# EAGLE board ikkeiplexing_7SEG (EAGLE 5.10)
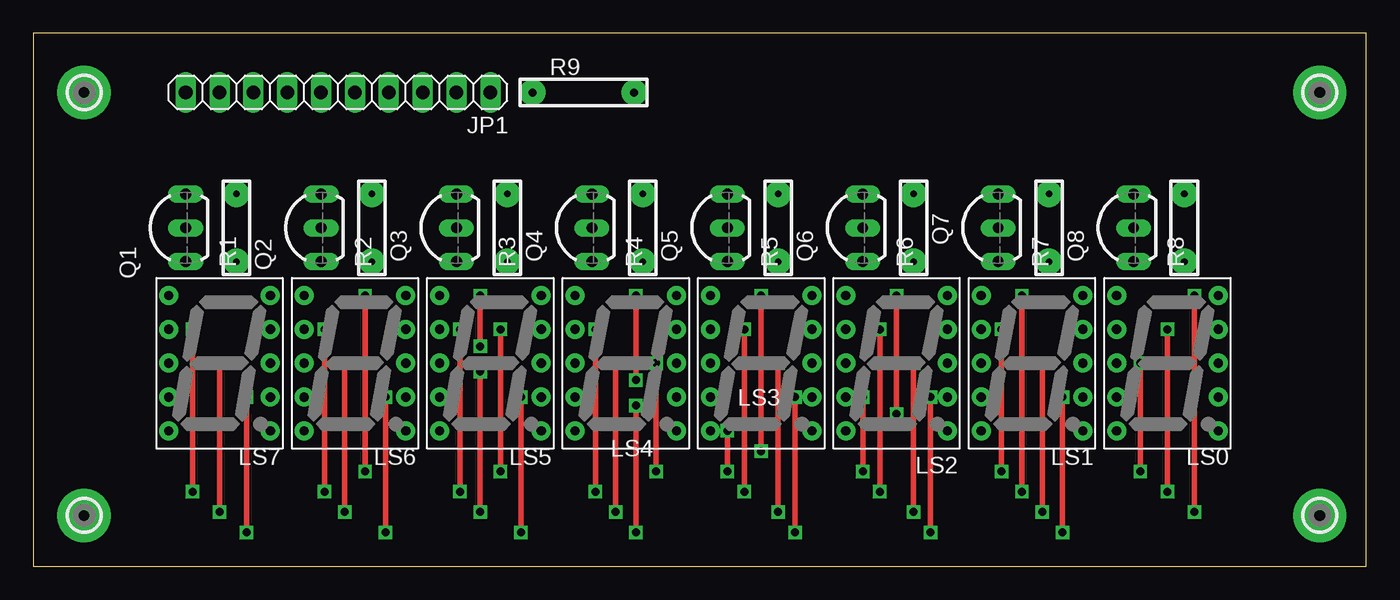
[diagram p0: board, top side]
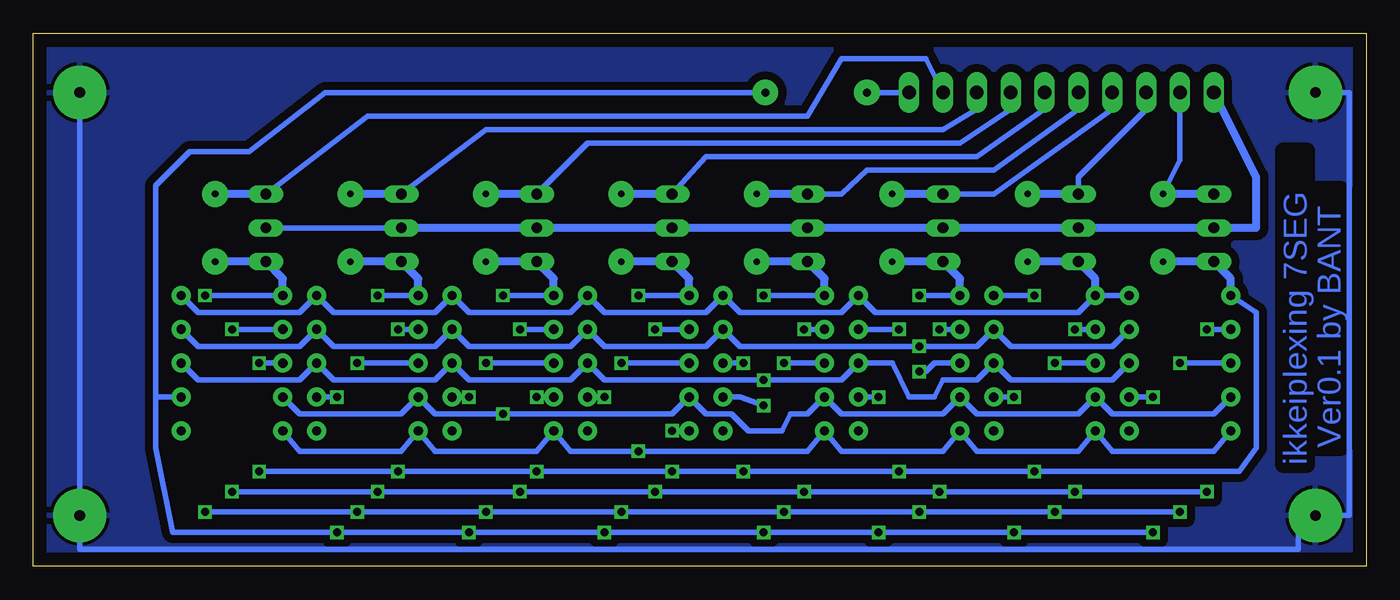
[diagram p1: board, bottom side, seen from below]

Size 100 x 40 mm. Coordinates in mm from the lower left corner, seen from the top.
Outline: 0,0 100,0 100,40 0,40 0,0
Copper layers (1*16): Top 0.035mm / dielectric 1.5mm / Bottom 0.035mm
Design rules "default": minimum track width 10mil, minimum drill 24mil, track to track 8mil, track to pad 8mil, pad to pad 8mil, via to via 8mil, smd to smd 8mil, copper to edge 40mil, drill to drill 8mil, minimum pad ring 10mil, minimum via ring 8mil, stop-mask expansion 4mil, vias tented up to drill 0mil, thermal gap 10mil

## Footprints (pad centres in the part's own frame; a part is rotated, then mirrored left to right if it is on the bottom)
1X10 = drill 1.016 long: 1 -11.43,0; 2 -8.89,0; 3 -6.35,0; 4 -3.81,0; 5 -1.27,0; 6 1.27,0; 7 3.81,0; 8 6.35,0; 9 8.89,0; 10 11.43,0
7SEG-10 = drill 0.7 pad 1.422 round: 1 -3.81,5.08; 2 -3.81,2.54; 3 -3.81,0; 4 -3.81,-2.54; 5 -3.81,-5.08; 6 3.81,-5.08; 7 3.81,-2.54; 8 3.81,0; 9 3.81,2.54; 10 3.81,5.08
PAD-2.1 = drill 0.8 pad 4 round: B2,1 0,0
TO92 = drill 0.813 long: B 2.54,0; C 0,0; E -2.54,0
R_0.125W_2 = drill 0.5 pad 1.93 round: 1 -2.54,0; 2 2.54,0
R_0.125W_3 = drill 0.6 pad 1.93 round: 1 -3.81,0; 2 3.81,0

## Placement (x,y rotation side)
JP1  [1X10]  22.86,35.56 180 top
LS0  [7SEG-10]  85.09,15.24 0 top
LS1  [7SEG-10]  74.93,15.24 0 top
LS2  [7SEG-10]  64.77,15.24 0 top
LS3  [7SEG-10]  54.61,15.24 0 top
LS4  [7SEG-10]  44.45,15.24 0 top
LS5  [7SEG-10]  34.29,15.24 0 top
LS6  [7SEG-10]  24.13,15.24 0 top
LS7  [7SEG-10]  13.97,15.24 0 top
MT1  MOUNT-PAD2.1  [PAD-2.1]  3.81,35.56 0 top
MT2  MOUNT-PAD2.1  [PAD-2.1]  3.81,3.81 0 top
MT3  MOUNT-PAD2.1  [PAD-2.1]  96.52,3.81 0 top
MT4  MOUNT-PAD2.1  [PAD-2.1]  96.52,35.56 0 top
Q1  2SC1815  [TO92]  11.43,25.4 90 top
Q2  2SC1815  [TO92]  21.59,25.4 90 top
Q3  2SC1815  [TO92]  31.75,25.4 90 top
Q4  2SC1815  [TO92]  41.91,25.4 90 top
Q5  2SC1815  [TO92]  52.07,25.4 90 top
Q6  2SC1815  [TO92]  62.23,25.4 90 top
Q7  2SC1815  [TO92]  72.39,25.4 90 top
Q8  2SC1815  [TO92]  82.55,25.4 90 top
R1  100  [R_0.125W_2]  15.24,25.4 270 top
R2  100  [R_0.125W_2]  25.4,25.4 270 top
R3  100  [R_0.125W_2]  35.56,25.4 270 top
R4  100  [R_0.125W_2]  45.72,25.4 270 top
R5  100  [R_0.125W_2]  55.88,25.4 270 top
R6  100  [R_0.125W_2]  66.04,25.4 270 top
R7  100  [R_0.125W_2]  76.2,25.4 270 top
R8  100  [R_0.125W_2]  86.36,25.4 270 top
R9  100  [R_0.125W_3]  41.27,35.56 0 top

## Library data of the parts
JP1 = pinheader
LS0 LS1-LS7 = 7seg_led
MT1-MT4 R1-R9 = MyLib
Q1-Q8 = bant

## Nets
GND: MT1.B2,1 MT2.B2,1 MT3.B2,1 MT4.B2,1
LINE2: JP1.9 Q1.B R1.1
LINE3: JP1.8 Q2.B R2.1
LINE4: JP1.7 Q3.B R3.1
LINE5: JP1.6 Q4.B R4.1
LINE6: JP1.5 Q5.B R5.1
LINE7: JP1.4 Q6.B R6.1
LINE8: JP1.3 Q7.B R7.1
LINE9: JP1.2 Q8.B R8.1
LINE10: JP1.1 R9.1
N$2: LS0.2 LS1.1 LS2.2 LS3.2 LS4.2 LS5.2 LS6.2 LS7.2 Q7.E R7.2
N$3: LS0.4 LS1.4 LS2.1 LS3.4 LS4.4 LS5.4 LS6.4 LS7.4 Q6.E R6.2
N$4: LS0.9 LS1.9 LS2.9 LS3.9 LS4.9 LS5.1 LS6.9 LS7.9 Q3.E R3.2
N$8: LS0.10 LS1.10 LS2.10 LS3.10 LS4.10 LS5.10 LS6.1 LS7.10 Q2.E R2.2
N$9: LS0.5 LS1.5 LS2.5 LS3.1 LS4.5 LS5.5 LS6.5 LS7.5 Q5.E R5.2
N$11: LS0.3 LS1.2 LS2.4 LS3.5 LS4.8 LS5.9 LS6.10 LS7.1 Q1.E R1.2
N$13: LS0.8 LS1.8 LS2.8 LS3.8 LS4.1 LS5.8 LS6.8 LS7.8 Q4.E R4.2
N$32: LS0.7 LS1.7 LS2.7 LS3.7 LS4.7 LS5.7 LS6.7 LS7.7 R9.2
N$34: LS0.1 LS1.3 LS2.3 LS3.3 LS4.3 LS5.3 LS6.3 LS7.3 Q8.E R8.2
VCC: JP1.10 Q1.C Q2.C Q3.C Q4.C Q5.C Q6.C Q7.C Q8.C

## Tracks (layer width: path | path; a pad name or v marks a point on that pad's centre or on a via)
GND
  Bottom 0.406: MT4.B2,1 MT3.B2,1 96.52,1.27 5.08,1.27 5.08,3.81 MT2.B2,1 1.27,3.81 1.27,35.56 MT1.B2,1
  pour Bottom (isolate 0.61): 0,40.64 0,0 100.33,0 100.33,40.64
LINE2
  Bottom 0.406: JP1.9 13.97,30.48 R1.1
  Bottom 0.61: Q1.B R1.1
LINE3
  Bottom 0.406: JP1.8 16.51,34.29 21.59,29.21 Q2.B
  Bottom 0.61: Q2.B R2.1
LINE4
  Bottom 0.406: Q3.B 27.94,27.94 19.05,34.29 JP1.7
  Bottom 0.61: Q3.B R3.1
LINE5
  Bottom 0.406: Q4.B 39.37,27.94 37.47,29.72 27.94,29.72 21.59,34.29 JP1.6
  Bottom 0.61: Q4.B R4.1
LINE6
  Bottom 0.406: Q5.B 49.53,30.73 29.21,30.73 24.13,34.29 JP1.5
  Bottom 0.61: Q5.B R5.1
LINE7
  Bottom 0.406: Q6.B 58.42,31.75 30.48,31.75 26.67,34.29 JP1.4
  Bottom 0.61: Q6.B R6.1
LINE8
  Bottom 0.406: Q7.B 66.04,32.77 31.75,32.77 29.21,34.29 JP1.3
  Bottom 0.61: Q7.B R7.1
LINE9
  Bottom 0.406: Q8.B 74.93,33.78 41.91,33.78 39.37,38.1 33.02,38.1 JP1.2
  Bottom 0.61: Q8.B R8.1
LINE10
  Bottom 0.406: JP1.1 R9.1
N$2  (via drill 0.6)
  Top 0.406: v85.09,5.59 v85.09,17.78 | v11.94,5.59 v11.94,17.78 | v21.84,5.59 v21.84,17.78 | v32,5.59 v32,17.78 | v42.16,5.59 v42.16,17.78 | v63.5,5.59 v63.5,17.78 | v74.17,5.59 v74.17,20.32 | v53.34,5.59 v53.34,17.78
  Bottom 0.406: v85.09,17.78 LS0.2 | v11.94,5.59 v21.84,5.59 v32,5.59 v42.16,5.59 v53.34,5.59 v63.5,5.59 v74.17,5.59 v85.09,5.59 | v11.94,17.78 LS7.2 | v21.84,17.78 LS6.2 | v32,17.78 LS5.2 | v42.16,17.78 LS4.2 | v63.5,17.78 LS2.2 | v74.17,20.32 LS1.1 | v53.34,17.78 LS3.2
  Bottom 0.61: LS1.1 71.12,21.59 Q7.E R7.2
N$3  (via drill 0.6)
  Top 0.406: v64.77,11.43 v64.77,20.32
  Bottom 0.406: LS7.4 11.43,11.43 19.05,11.43 LS6.4 21.59,11.43 29.21,11.43 LS5.4 31.75,11.43 39.37,11.43 LS4.4 41.91,11.43 43.18,11.43 43.81,10.16 46.35,10.16 47.62,11.43 49.53,11.43 LS3.4 52.07,11.43 v64.77,11.43 69.85,11.43 LS1.4 72.39,11.43 80.01,11.43 LS0.4 | v64.77,20.32 LS2.1
  Bottom 0.61: LS2.1 60.96,21.59 Q6.E R6.2
N$4  (via drill 0.6)
  Top 0.406: v33.53,16.51 v33.53,20.32
  Bottom 0.406: LS7.9 19.05,16.51 26.67,16.51 LS6.9 29.21,16.51 v33.53,16.51 46.99,16.51 LS4.9 49.53,16.51 57.15,16.51 LS3.9 59.69,16.51 67.31,16.51 LS2.9 69.85,16.51 77.47,16.51 LS1.9 80.01,16.51 87.63,16.51 LS0.9 | v33.53,20.32 LS5.1
  Bottom 0.61: LS5.1 30.48,21.59 Q3.E R3.2
N$8
  Bottom 0.406: LS7.10 LS6.1 21.59,19.05 36.83,19.05 LS5.10 39.37,19.05 46.99,19.05 LS4.10 49.53,19.05 57.15,19.05 LS3.10 59.69,19.05 67.31,19.05 LS2.10 69.85,19.05 77.47,19.05 LS1.10 80.01,19.05 87.63,19.05 LS0.10
  Bottom 0.61: LS6.1 20.32,21.59 Q2.E R2.2
N$9  (via drill 0.6)
  Top 0.406: v54.61,8.64 v54.61,20.32
  Bottom 0.406: LS7.5 11.43,8.64 19.05,8.64 LS6.5 21.59,8.64 29.21,8.64 LS5.5 31.75,8.64 39.37,8.64 LS4.5 41.91,8.64 v54.61,8.64 59.69,8.64 LS2.5 62.23,8.64 69.85,8.64 LS1.5 72.39,8.64 80.01,8.64 LS0.5 | v54.61,20.32 LS3.1
  Bottom 0.61: LS3.1 50.8,21.59 Q5.E R5.2
N$11  (via drill 0.6)
  Top 0.406: v83.06,7.11 v83.06,15.24 | v24.89,7.11 v24.89,20.32 | v35.05,7.11 v35.05,17.78 | v46.74,7.11 v46.74,15.24 | v52.07,7.11 v52.07,10.16 | v62.23,7.11 v62.23,12.7 | v72.64,7.11 v72.64,17.78
  Bottom 0.406: v83.06,7.11 v72.64,7.11 v62.23,7.11 v52.07,7.11 v46.74,7.11 v35.05,7.11 v24.89,7.11 9.53,7.11 8.26,8.89 8.26,19.05 LS7.1 | v83.06,15.24 LS0.3 | v24.89,20.32 LS6.10 | v35.05,17.78 LS5.9 | v46.74,15.24 LS4.8 | v52.07,10.16 LS3.5 | v62.23,12.7 LS2.4 | v72.64,17.78 LS1.2
  Bottom 0.61: LS7.1 10.16,21.59 Q1.E R1.2
N$13  (via drill 0.6)
  Top 0.406: v45.21,13.97 v45.21,20.32
  Bottom 0.406: LS7.8 19.05,13.97 26.67,13.97 LS6.8 29.21,13.97 31.75,13.97 32.38,12.7 34.29,12.7 35.56,15.24 LS5.8 39.37,13.97 v45.21,13.97 57.15,13.97 LS3.8 59.69,13.97 67.31,13.97 LS2.8 69.85,13.97 77.47,13.97 LS1.8 80.01,13.97 87.63,13.97 LS0.8 | v45.21,20.32 LS4.1
  Bottom 0.61: LS4.1 40.64,21.59 Q4.E R4.2
N$32  (via drill 0.6)
  Top 0.406: v16,2.54 v16,12.7 | v26.42,2.54 v26.42,12.7 | v36.58,2.54 v36.58,12.7 | v45.21,2.54 v45.21,12.06 | v77.22,2.54 v77.22,12.7 | v67.31,2.54 v67.31,12.7 | v57.15,2.54 v57.15,12.7
  Bottom 0.406: v16,12.7 LS7.7 | v16,2.54 v26.42,2.54 v36.58,2.54 v45.21,2.54 v57.15,2.54 v67.31,2.54 v77.22,2.54 89.53,2.54 90.81,8.89 90.81,12.7 | 90.81,12.7 LS0.7 | v26.42,12.7 LS6.7 | v36.58,12.7 LS5.7 | v45.21,12.06 46.99,12.7 LS4.7 | v77.22,12.7 LS1.7 | v67.31,12.7 LS2.7 | v57.15,12.7 LS3.7 | R9.2 78.11,35.56 83.82,31.11 88.27,31.11 90.81,28.57 90.81,12.7
N$34  (via drill 0.6)
  Top 0.406: v13.97,4.06 v13.97,15.24 | v87.12,4.06 v87.12,20.32 | v75.69,4.06 v75.69,15.24 | v66.04,4.06 v66.04,15.24 | v55.88,4.06 v55.88,15.24 | v43.69,4.06 v43.69,15.24 | v33.53,4.06 v33.53,14.61 | v23.37,4.06 v23.37,15.24
  Bottom 0.406: v13.97,15.24 LS7.3 | v13.97,4.06 v23.37,4.06 v33.53,4.06 v43.69,4.06 v55.88,4.06 v66.04,4.06 v75.69,4.06 v87.12,4.06 | v87.12,20.32 LS0.1 | v75.69,15.24 LS1.3 | v66.04,15.24 LS2.3 | v55.88,15.24 LS3.3 | v43.69,15.24 LS4.3 | v23.37,15.24 LS6.3 | v33.53,14.61 33.02,14.61 32.38,15.24 LS5.3
  Bottom 0.61: LS0.1 81.28,21.59 Q8.E R8.2
VCC
  Bottom 0.406: Q7.C Q8.C
  Bottom 0.61: Q7.C Q6.C Q5.C Q4.C Q3.C Q2.C Q1.C 8.26,25.4 8.26,29.21 JP1.10

## Text on the board
Bottom: Ver0.1 by BANT | ikkeiplexing 7SEG